# Altium PCB Rev5.PcbDoc (part 4 of 4)
Units mil, origin at the board's own origin, x right, y up, seen from the top; angles counter-clockwise.
Board outline 3019 x 2316 mil, 2 copper layers (Top Layer, Bottom Layer); 26 components, 37 nets, 159 pads, 132 vias.
Unrouted connection lines stored in the file: 2.
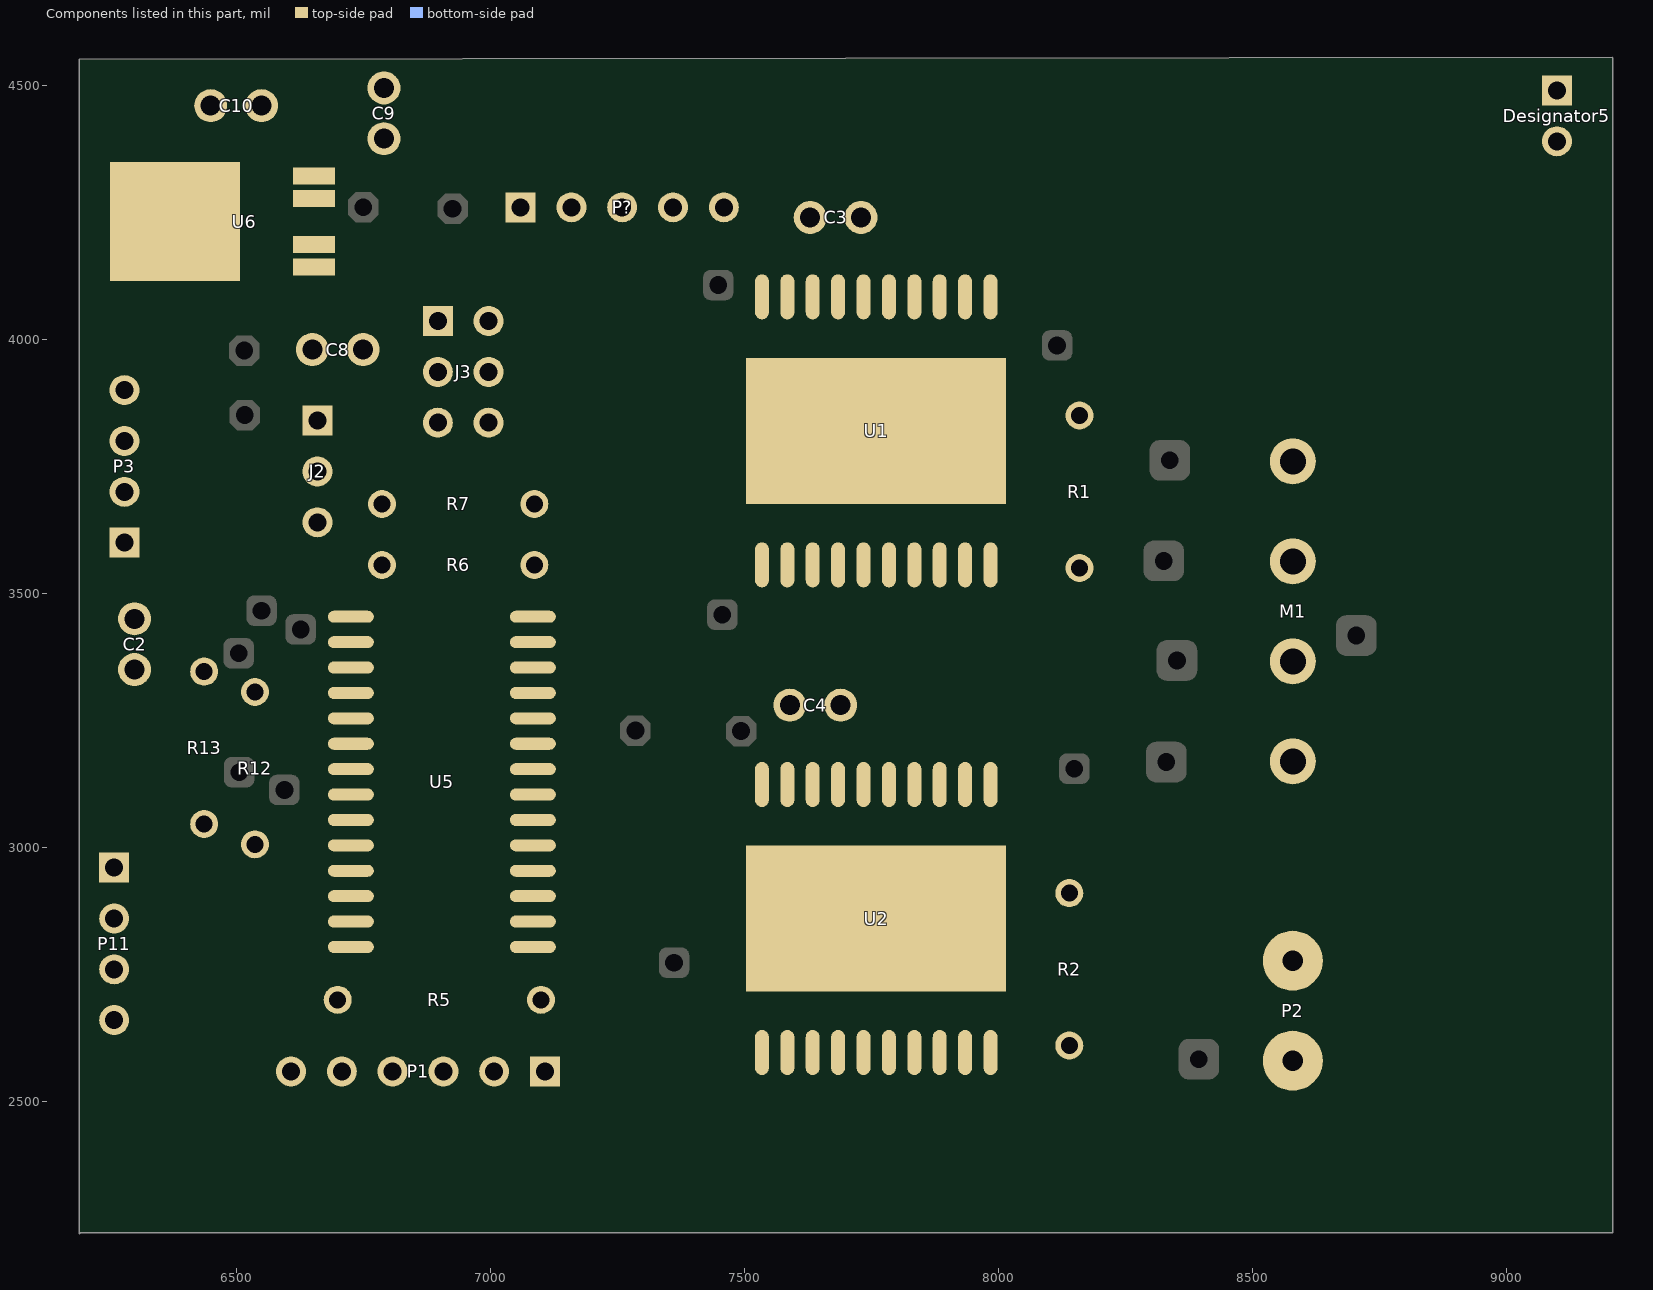
[diagram p4: the components of this part, seen from the top]

## Via types
v1: diameter 25.98, hole 12.99, Top Layer to Bottom Layer, tented top, 132 vias

## Nets (pads, with @x,y where several pads share a name; then routed paths per layer and width w, separated by ;. In a path a pad name is that pad's centre, name@x,y a point inside that pad or via, vN(x,y) a via of type N, cw(c..) or ccw(c..) an arc to the next point about the centre after c; other vN are vias at no path point) (continued)
copper on no net: (continued)
  Bottom Layer w1.3: 8871.5,4251.2 8876.7,4251.2 ; 8871.5,4252.5 8876.7,4252.5 ; 8872.8,4152.4 8878,4152.4 ; 8872.8,4153.7 8878,4153.7 ; 8872.8,4155 8878,4155 ; 8872.8,4156.3 8878,4156.3 ; 8872.8,4248.6 8878,4248.6 ; 8872.8,4249.9 8878,4249.9 ; 8874.1,4157.6 8879.3,4157.6 ; 8874.1,4158.9 8879.3,4158.9 ; 8874.1,4160.2 8879.3,4160.2 ; 8874.1,4161.5 8879.3,4161.5 ; 8874.1,4244.7 8879.3,4244.7 ; 8874.1,4246 8879.3,4246 ; 8874.1,4247.3 8878,4247.3 ; 8875.4,4162.8 8880.6,4162.8 ; 8875.4,4164.1 8880.6,4164.1 ; 8875.4,4165.4 8881.9,4165.4 ; 8875.4,4166.7 8881.9,4166.7 ; 8875.4,4236.9 8880.6,4236.9 ; 8875.4,4238.2 8880.6,4238.2 ; 8875.4,4239.5 8880.6,4239.5 ; 8875.4,4240.8 8880.6,4240.8 ; 8875.4,4242.1 8880.6,4242.1 ; 8875.4,4243.4 8879.3,4243.4 ; 8876.7,4168 8881.9,4168 ; 8876.7,4169.3 8881.9,4169.3 ; 8876.7,4201.8 8883.2,4201.8 ; 8876.7,4203.1 8883.2,4203.1 ; 8876.7,4204.4 8883.2,4204.4 ; 8876.7,4205.7 8883.2,4205.7 ; 8876.7,4207 8883.2,4207 ; 8876.7,4208.3 8883.2,4208.3 ; 8876.7,4209.6 8883.2,4209.6 ; 8876.7,4210.9 8883.2,4210.9 ; 8876.7,4212.2 8883.2,4212.2 ; 8876.7,4213.5 8883.2,4213.5 ; 8876.7,4214.8 8883.2,4214.8 ; 8876.7,4216.1 8883.2,4216.1 ; 8876.7,4221.3 8883.2,4221.3 ; 8876.7,4222.6 8881.9,4222.6 ; 8876.7,4223.9 8881.9,4223.9 ; 8876.7,4225.2 8881.9,4225.2 ; 8876.7,4226.5 8881.9,4226.5 ; 8876.7,4227.8 8881.9,4227.8 ; 8876.7,4229.1 8881.9,4229.1 ; 8876.7,4230.4 8881.9,4230.4 ; 8876.7,4231.7 8881.9,4231.7 ; 8876.7,4233 8881.9,4233 ; 8876.7,4234.3 8881.9,4234.3 ; 8876.7,4235.6 8881.9,4235.6 ; 8878,4170.6 8881.9,4170.6 ; 8878,4171.9 8881.9,4171.9 ; 8878,4173.2 8881.9,4173.2 ; 8878,4174.5 8881.9,4174.5 ; 8878,4175.8 8883.2,4175.8 ; 8878,4177.1 8883.2,4177.1 ; 8878,4178.4 8883.2,4178.4 ; 8878,4179.7 8883.2,4179.7 ; 8878,4181 8883.2,4181 ; 8878,4182.3 8883.2,4182.3 ; 8878,4183.6 8883.2,4183.6 ; 8878,4184.9 8883.2,4184.9 ; 8878,4186.2 8883.2,4186.2 ; 8878,4187.5 8883.2,4187.5 ; 8878,4188.8 8883.2,4188.8 ; 8878,4190.1 8883.2,4190.1 ; 8878,4191.4 8883.2,4191.4 ; 8878,4192.7 8883.2,4192.7 ; 8878,4194 8883.2,4194 ; 8878,4195.3 8883.2,4195.3 ; 8878,4196.6 8881.9,4196.6 ; 8878,4197.9 8881.9,4197.9 ; 8878,4199.2 8881.9,4199.2 ; 8878,4200.5 8883.2,4200.5 ; 8878,4217.4 8883.2,4217.4 ; 8878,4218.7 8883.2,4218.7 ; 8878,4220 8883.2,4220
  Bottom Layer w20: 9113,4380 ccw(c9112.1,4439.01) 9113,4498.03

## Polygon pours and split planes (outlines as drawn)
GND on Bottom Layer "Top Layer-No Net" (solid): 6194,4548 6194,2239 6196,2237 6199,2240 9206,2240 9206,4554 9204,4556

## Other copper
Top Layer:
  text "SBHX Brushed Motor Controller" at 6889,4458 h180
  text "Rev. 7" at 8198,4386 h100
  text "Utility Pins" at 7133,4324 h100
  text "232" at 7054,4087 h100 r270
  text "<->" at 7055,3973 h100 r270
  text "GND" at 6338,3888 h50
  text "3V <-> 5V" at 6569,3869 h100 r270
  text "I2C" at 7053,3866 h100 r270
  text "SDA" at 6337,3807 h50
  text "RX" at 6338,3779 h50
  text "SCL" at 6336,3706 h50
  text "TX" at 6336,3679 h50
  text "3V/5V" at 6336,3590 h50
  text "The Greusome Twosome:" at 6245,2404 h100
  text "Swiss" at 6749,2347 h100
  text "TheOtherMike" at 6248,2346 h100

## Silkscreen, mask and mechanical layers (free items; w line width, h text height)
Mechanical 1:
  lines w9.84: 6191,2239 6191,4551 6195,4555 9209,4555 9210,4556 9210,2241 9208,2239 6191,2239

## Text inside footprints (layer, text, board x,y; h text height)
J3: Top Overlay "6" at 6977,3776 h50 r270; Top Overlay "5" at 6877,3776 h50 r270; Top Overlay "2" at 6977,4136 h50 r270; Top Overlay "1" at 6877,4116 h50 r270
M1: Top Overlay "5A Max" at 8936,2849 h60 r270; Top Overlay "Stepper 1" at 9020,3695 h60 r270; Top Overlay "M2" at 8830,3310 h60 r270; Top Layer "5A" at 8846,3510 h45 r270; Top Layer "M2" at 8830,3310 h45 r270; Top Layer "Stepper 1" at 9020,3642 h45 r270
P2: Top Overlay "-" at 8360,2765 h60 r90; Top Overlay "+" at 8360,2560 h60 r90; Top Overlay "20V Max" at 8810,2887 h60 r270; Top Layer "+" at 8825,2554 h60 r90; Top Layer "-" at 8827,2803 h60 r90; Top Layer "20V Max" at 8866,2846 h45 r270